# EAGLE board Pyr0-Piezo-FFC-Direct-Creality-X-Board.2.0.1 (EAGLE 9.3.2)
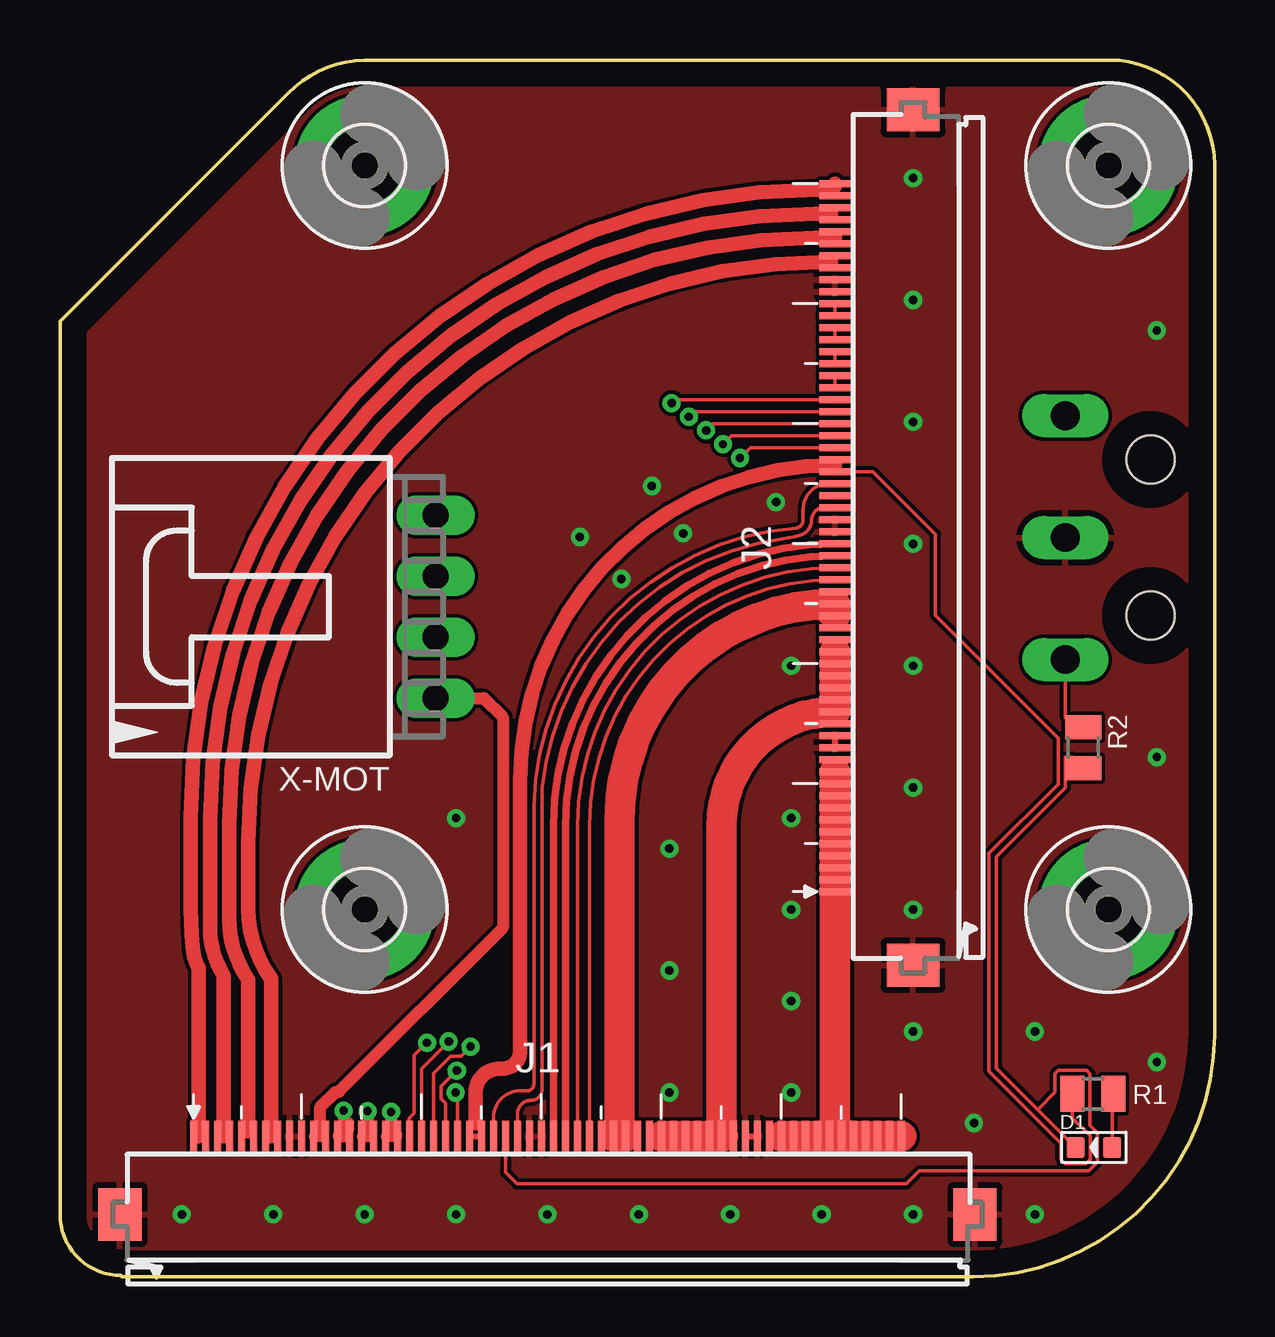
[diagram p0: board, top side]
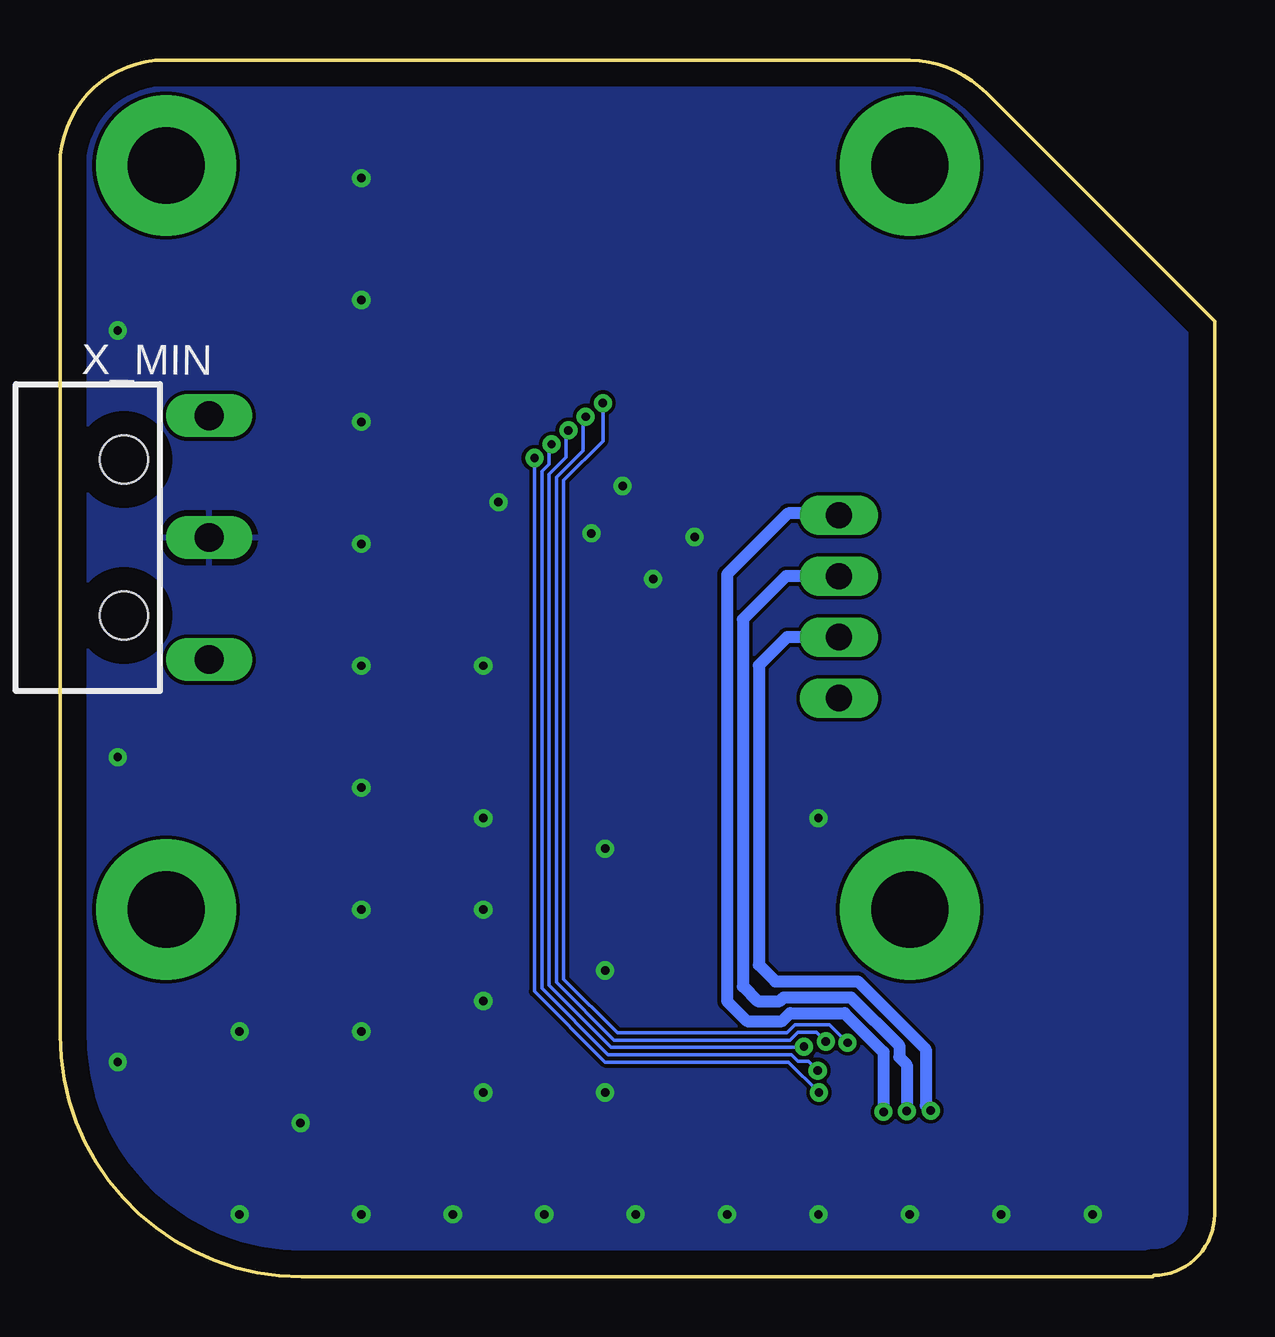
[diagram p1: board, bottom side, seen from below]

Size 48.12 x 50.7 mm. Coordinates in mm from the lower left corner, seen from the top.
Outline: 2.54,0.06 arc-90 0,2.6 0,39.83 9.5,49.33 arc-43 12.7,50.7 43.75,50.7 arc-90 48.12,46.33 48.12,10.08 arc-90 38.05,0 2.57,0 2.52,0.05 2.53,0.05 2.54,0.06
Copper layers (1*16): Top 0.035mm / dielectric 1.5mm / Bottom 0.035mm
Design rules "default": minimum track width 6mil, minimum drill 0.35mm, track to track 6mil, track to pad 6mil, pad to pad 6mil, via to via 6mil, smd to smd 6mil, copper to edge 40mil, drill to drill 6mil, minimum pad ring 10mil, minimum via ring 8mil, stop-mask expansion 4mil, vias tented up to drill 0mil, thermal gap 10mil

## Footprints (pad centres in the part's own frame; a part is rotated, then mirrored left to right if it is on the bottom)
SEEED-LED_LED-0603 = smd 0.762 x 0.889: + -0.762,0; - 0.762,0
HOLES_3,2-PAD = drill 3.2 pad 5.842: B3,2 0,0
FFC-60P_0.5_MOLEX_505110-6091 = smd 0.3 x 1.3: 1 -14.75,3.25; 2 -14.25,3.25; 3 -13.75,3.25; 4 -13.25,3.25; 5 -12.75,3.25; 6 -12.25,3.25; 7 -11.75,3.25; 8 -11.25,3.25; 9 -10.75,3.25; 10 -10.25,3.25; 11 -9.75,3.25; 12 -9.25,3.25; 13 -8.75,3.25; 14 -8.25,3.25; 15 -7.75,3.25; 16 -7.25,3.25; 17 -6.75,3.25; 18 -6.25,3.25; 19 -5.75,3.25; 20 -5.25,3.25; 21 -4.75,3.25; 22 -4.25,3.25; 23 -3.75,3.25; 24 -3.25,3.25; 25 -2.75,3.25; 26 -2.25,3.25; 27 -1.75,3.25; 28 -1.25,3.25; 29 -0.75,3.25; 30 -0.25,3.25; 31 0.25,3.25; 32 0.75,3.25; 33 1.25,3.25; 34 1.75,3.25; 35 2.25,3.25; 36 2.75,3.25; 37 3.25,3.25; 38 3.75,3.25; 39 4.25,3.25; 40 4.75,3.25; 41 5.25,3.25; 42 5.75,3.25; 43 6.25,3.25; 44 6.75,3.25; 45 7.25,3.25; 46 7.75,3.25; 47 8.25,3.25; 48 8.75,3.25; 49 9.25,3.25; 50 9.75,3.25; 51 10.25,3.25; 52 10.75,3.25; 53 11.25,3.25; 54 11.75,3.25; 55 12.25,3.25; 56 12.75,3.25; 57 13.25,3.25; 58 13.75,3.25; 59 14.25,3.25; 60 14.75,3.25 | smd 1.8 x 2.2: S$1 17.821,0; S$2 -17.821,0
R0805 = smd 1 x 1.5: 1 -0.85,0; 2 0.85,0
70553-04 = drill 1.092 long: 1 -3.81,-7.62; 2 -1.27,-7.62; 3 1.27,-7.62; 4 3.81,-7.62
MICROSWITCH_5.08 = drill 1.2 long: P$1 0,5.08; P$2 0,0; P$3 0,-5.08 | hole 2: 3.55,3.25; 3.55,-3.25

## Placement (x,y rotation side)
D1  [SEEED-LED_LED-0603]  43.09,5.39 180 top
H1  HOLES_MOUNT-PAD-ROUND3.2  [HOLES_3,2-PAD]  12.7,15.3 0 top
H2  HOLES_MOUNT-PAD-ROUND3.2  [HOLES_3,2-PAD]  12.7,46.3 0 top
H3  HOLES_MOUNT-PAD-ROUND3.2  [HOLES_3,2-PAD]  43.7,15.3 0 top
H4  HOLES_MOUNT-PAD-ROUND3.2  [HOLES_3,2-PAD]  43.7,46.3 0 top
J1  FFC_MOLEX_0.5MM  [FFC-60P_0.5_MOLEX_505110-6091]  20.32,2.6 0 top
J2  FFC_MOLEX_0.5MM  [FFC-60P_0.5_MOLEX_505110-6091]  35.56,30.8 90 top
R1  1K  [R0805]  43.05,7.63 180 top
R2  1K  [R0805]  42.65,22.05 270 top
X-MOT  C-GRID-04-70553  [70553-04]  8.04,27.93 90 top
X_MIN  LIMIT_SWITCHMICRO_SPDT_5.08  [MICROSWITCH_5.08]  41.91,30.8 180 bottom

## Library data of the parts
D1 H1-H4 J1 J2 X_MIN = PiezoFFC
R1 R2 = PiezoFFC; MPN: RC0805JR-072KL
X-MOT = PiezoFFC; MF: MOLEX; OC_FARNELL: unknown; OC_NEWARK: unknown

## Nets
AGND: J1.9 J1.10 J1.29 J1.30 J1.47 J1.48 J1.S$1 J1.S$2 J2.13 J2.14 J2.31 J2.32 J2.51 J2.52 J2.S$1 J2.S$2 X_MIN.P$2
E0_1A: J1.3 J1.4 J2.57 J2.58
E0_1B: J1.1 J1.2 J2.59 J2.60
E0_2A: J1.5 J1.6 J2.55 J2.56
E0_2B: J1.7 J1.8 J2.53 J2.54
FAN0_GATE: J1.32 J2.29
FAN1_GATE: J1.31 J2.30
HE0-: J1.39 J1.40 J1.41 J1.42 J1.43 J1.44 J1.45 J1.46 J2.15 J2.16 J2.17 J2.18 J2.19 J2.20 J2.21 J2.22
PT100_OUT: J1.28 J2.33
RST: J1.23 J2.38
SCL: J1.20 J2.41
SDA: J1.19 J2.42
TH0+: J1.34 J2.27
TH0-: J1.33 J2.28
TTL_RXD: J1.22 J2.39
TTL_TXD: J1.21 J2.40
V_INT: J1.35 J1.36 J1.37 J1.38 J2.23 J2.24 J2.25 J2.26
VCC: J1.49 J1.50 J1.51 J1.52 J1.53 J1.54 J1.55 J1.56 J1.57 J1.58 J1.59 J1.60 J2.1 J2.2 J2.3 J2.4 J2.5 J2.6 J2.7 J2.8 J2.9 J2.10 J2.11 J2.12
VCC_REG: J1.24 J1.25 J2.36 J2.37 R1.2
X_1A: J1.13 J1.14 X-MOT.2
X_1A_NC: J2.47 J2.48
X_1B: J1.11 J1.12 X-MOT.1
X_1B_NC: J2.49 J2.50
X_2A: J1.15 J1.16 X-MOT.3
X_2A_NC: J2.45 J2.46
X_2B: J1.17 J1.18 X-MOT.4
X_2B_NC: J2.43 J2.44
X_MIN_LED: D1.+ R1.1
X_MIN_TRG_NC: J2.34
X_MIN_TRIG: D1.- J1.27 R2.2
X_PULLDOWN: R2.1 X_MIN.P$1
Z_MIN_TRIG: J1.26 J2.35

## Tracks (layer width: path | path; a pad name or v marks a point on that pad's centre or on a via)
AGND  (via drill 0.35)
  Top 0.254: J2.14 J2.13 | J1.47 J1.48
  other vias: 35.56,2.6 24.13,2.6 27.94,2.6 31.75,2.6 30.48,7.68 38.1,6.41 25.4,7.68 20.32,2.6 16.51,2.6 12.7,2.6 8.89,2.6 5.08,2.6 30.48,11.49 25.4,12.76 40.64,2.6 45.72,8.95 40.64,10.22 35.56,10.22 35.56,15.3 30.48,15.3 45.72,21.65 35.56,20.38 35.56,25.46 35.56,30.54 35.56,35.62 45.72,39.43 35.56,45.78 35.56,40.7 30.48,25.46 29.85,32.28 25.98,30.98 23.4,29.08 24.67,32.95 21.67,30.83 30.48,19.11 25.4,17.84 16.51,19.11
  pour Top: 2.54,0.06 arc-90 0,2.6 0,39.83 9.5,49.33 arc-43 12.7,50.7 43.75,50.7 arc-90 48.12,46.33 48.12,10.08 arc-90 38.05,0 2.57,0 2.52,0.05 2.53,0.05
  pour Bottom: 2.54,0.06 arc-90 0,2.6 0,39.83 9.5,49.33 arc-43 12.7,50.7 43.75,50.7 arc-90 48.12,46.33 48.12,10.08 arc-90 38.05,0 2.57,0 2.52,0.05 2.53,0.05
E0_1A
  Top 0.152: 32.31,44.5 32.11,44.3 | J1.3 6.68,5.85 6.82,5.85 6.96,5.85 J1.4
  Top 0.254: J2.58 32.31,44.5 J2.57
  Top 0.61: 32.11,44.3 31.47,44.3 arc90 6.25,19.07 6.25,14.53 arc32 6.82,12.55 6.82,5.85
E0_1B
  Top 0.152: 5.77,5.85 J1.1 J1.2
  Top 0.254: J2.60 J2.59
  Top 0.61: J2.60 arc-90 32.06,45.3 31.57,45.3 arc90 5.45,19.18 5.45,15.33 arc5 5.52,13.75 arc9 5.6,13.33 arc16 5.77,12.88 5.77,5.85
E0_2A
  Top 0.152: 7.85,6.07 7.96,5.96 7.96,5.85 | 7.96,5.85 7.68,5.85 J1.5 | J1.6 7.96,5.85
  Top 0.254: J2.56 32.31,43.25 J2.55
  Top 0.61: 32.31,43.25 arc90 32.26,43.3 31.47,43.3 arc90 7.05,18.88 7.05,14.93 arc35 7.85,12.39 7.85,6.07
E0_2B
  Top 0.152: J2.54 32.06,42.3 | J1.8 8.8,5.85 J1.7
  Top 0.254: J2.54 J2.53
  Top 0.61: 32.06,42.3 32.05,42.3 arc90 7.85,18.1 7.85,15.35 arc36 8.8,12.43 8.8,5.85
FAN0_GATE
  Top 0.305: J2.29 arc90 21.07,18.81 J1.32
FAN1_GATE
  Top 0.305: J2.30 arc90 20.57,18.81 J1.31
HE0-
  Top 0.254: J2.15 J2.16 J2.17 J2.18 J2.19 J2.20 J2.21 J2.22 | J1.46 27.63,5.85 | J1.45 J1.44 J1.43 J1.42 J1.41 J1.40 J1.39
  Top 1.27: J1.40 J1.45 | J1.45 27.63,5.85 | J2.21 J2.16 arc90 27.57,18.81 J1.45
PT100_OUT
  Top 0.152: J2.33 31.85,32.05 arc90 31.32,31.53 arc-74 30.85,30.9 arc-8 30.12,30.75 arc76 20.1,20.35 20.1,7.83 arc-90 19.62,7.35 arc90 19.07,6.79 J1.28
RST  (via drill 0.35)
  Top 0.152: J2.38 28.78,34.55 v28.34,34.11 | v16.49,7.68 16.57,7.6 J1.23
  Bottom 0.152: v28.34,34.11 28.34,11.9 25.4,8.95 17.76,8.95 v16.49,7.68
SCL  (via drill 0.35)
  Top 0.152: J2.41 26.42,36.05 v26.21,35.84 | v16.2,9.8 15.07,8.67 J1.20
  Bottom 0.152: v26.21,35.84 26.32,35.73 26.32,34.41 27.43,33.31 27.43,12.27 25.02,9.86 17.7,9.86 17.36,10.2 16.6,10.2 v16.2,9.8
SDA  (via drill 0.35)
  Top 0.152: J2.42 25.64,36.55 v25.49,36.41 | v15.29,9.75 14.76,9.22 14.76,6.83 14.55,6.61 14.55,6.4 14.57,6.38 J1.19
  Bottom 0.152: v25.49,36.41 25.49,34.81 27.13,33.18 27.13,12.4 24.89,10.17 17.82,10.17 17.49,10.5 16.05,10.5 v15.29,9.75
TH0+
  Top 0.152: J2.27 arc90 22.07,18.81 J1.34
TH0-
  Top 0.152: J2.28 arc90 21.57,18.81 J1.33
TTL_RXD  (via drill 0.35)
  Top 0.152: v27.63,34.69 28,35.05 J2.39 | v16.54,8.59 15.88,7.93 15.88,7.43 16.07,7.24 J1.22
  Bottom 0.152: v27.63,34.69 27.74,34.59 27.74,33.86 28.04,33.56 28.04,12.02 25.27,9.26 17.63,9.26 17.36,8.99 16.94,8.99 v16.54,8.59
TTL_TXD  (via drill 0.35)
  Top 0.152: J2.40 27.21,35.55 v26.93,35.27 | v17.11,9.59 16.72,9.2 16.29,9.2 15.57,8.48 J1.21
  Bottom 0.152: v26.93,35.27 27.03,35.17 27.03,34.14 27.73,33.43 27.73,12.15 25.15,9.56 17.15,9.56 v17.11,9.59
V_INT
  Top 0.254: J2.24 J2.23 | J2.26 32.13,28.38 32.13,28.23 J2.25 | J1.35 J1.36 | J1.37 J1.38
  Top 1.27: J1.37 J1.36 arc90 23.32,6.11 23.32,19.07 arc-90 J2.25 J2.24 arc90 32.11,27.75
VCC
  Top 0.254: J1.60 J1.59 J1.58 J1.57 J1.56 J1.55 J1.54 J1.53 J1.52 J1.51 J1.50 J1.49 | J2.1 J2.2 J2.3 J2.4 J2.5 J2.6 J2.7 J2.8 J2.9 J2.10 J2.11 J2.12
  Top 1.27: J1.50 J1.55 | J1.55 J1.60 | J2.11 32.31,6.11 J1.55
VCC_REG
  Top 0.152: R1.2 42.2,6.61 42.94,5.87 42.94,4.91 42.75,4.72 41.91,4.72 41.72,4.91 41.72,5.57 38.72,8.57 38.72,17.64 41.61,20.53 41.61,22.45 36.49,27.56 36.49,30.94 33.89,33.54 J2.36
  Top 0.254: J2.36 32.31,33.83 J2.37 | J1.24 J1.25 17.57,6.16 arc90 17.32,6.4 | 18.32,8.68 18.48,8.68
  Top 0.61: 17.32,6.4 17.32,7.68 arc-90 18.32,8.68 | 18.48,8.68 arc90 19.17,9.38 19.17,20.69 arc-90 32.31,33.83
X_1A  (via drill 0.35)
  Top 0.152: J1.14 11.97,5.85 J1.13
  Top 0.508: v11.82,6.93 11.82,6.11 11.63,5.91 11.63,5.85 11.97,5.85 11.97,6.12 12.01,6.17 12.01,6.41
  Bottom 0.508: X-MOT.2 17.82,26.66 19,25.48 19,13 18.31,12.31 14.87,12.31 12.04,9.47 12.04,7.14 v11.82,6.93
X_1A_NC
  Top 0.152: J2.48 J2.47
X_1B
  Top 0.152: J1.12 10.97,5.85 J1.11
  Top 0.508: X-MOT.1 17.66,24.12 18.46,23.31 18.46,14.55 11.62,7.71 11.5,7.71 10.82,7.04 10.82,6.1 10.97,5.95 10.97,5.85 10.63,5.85
X_1B_NC
  Top 0.152: J2.50 J2.49
X_2A  (via drill 0.35)
  Top 0.152: J1.16 12.7,5.85 J1.15
  Top 0.508: v12.82,6.9 12.82,6.1 12.97,5.95 12.97,5.85 12.7,5.85 12.63,5.85
  Bottom 0.508: X-MOT.3 17.86,29.2 19.66,27.39 19.66,12.1 19.05,11.49 18.12,11.49 17.96,11.65 15.15,11.65 13.14,9.64 13.14,9.15 12.82,8.84 v12.82,6.9
X_2A_NC
  Top 0.152: J2.46 J2.45
X_2B  (via drill 0.35)
  Top 0.152: J1.17 14.01,5.85 J1.18
  Top 0.508: v13.8,6.88 13.8,6.12 14.01,5.91 14.01,5.85 13.63,5.85
  Bottom 0.508: X-MOT.4 15.73,31.81 17.78,31.81 20.32,29.27 20.32,11.49 19.48,10.65 18.02,10.65 17.69,10.99 15.42,10.99 13.8,9.37 v13.8,6.88
X_2B_NC
  Top 0.152: J2.44 J2.43
X_MIN_LED
  Top 0.152: D1.+ 43.86,7.58 R1.1
X_MIN_TRIG
  Top 0.152: 40.77,6.95 39.02,8.7 39.02,17.5 41.91,20.38 41.91,21.65 42.2,21.65 R2.2 | 40.77,6.95 D1.- | J1.27 18.57,4.35 19.05,3.87 35.29,3.87 35.83,4.41 42.88,4.41 43.25,4.78 43.25,6 42.93,6.31 42.93,8.47 42.8,8.6 41.61,8.6 41.48,8.47 41.48,7.68 40.77,6.98 40.77,6.95
X_PULLDOWN
  Top 0.152: R2.1 42.3,22.9 41.91,23.29 X_MIN.P$1
Z_MIN_TRIG
  Top 0.152: 32.1,33.05 J2.35 32.05,33.05 arc90 30.97,31.98 30.97,31.53 arc-85 30.68,31.2 arc84 19.75,19.6 19.75,8.03 arc-90 19.48,7.75 19.17,7.75 arc90 18.07,6.65 J1.26 arc-90 J1.26